# Altium PCB avcilar.PcbDoc
Units mm, origin at the board's own origin, x right, y up, seen from the top; angles counter-clockwise.
Board outline 60 x 75 mm, 2 copper layers (Top Layer, Bottom Layer); 40 components, 25 nets, 122 pads, 23 vias.
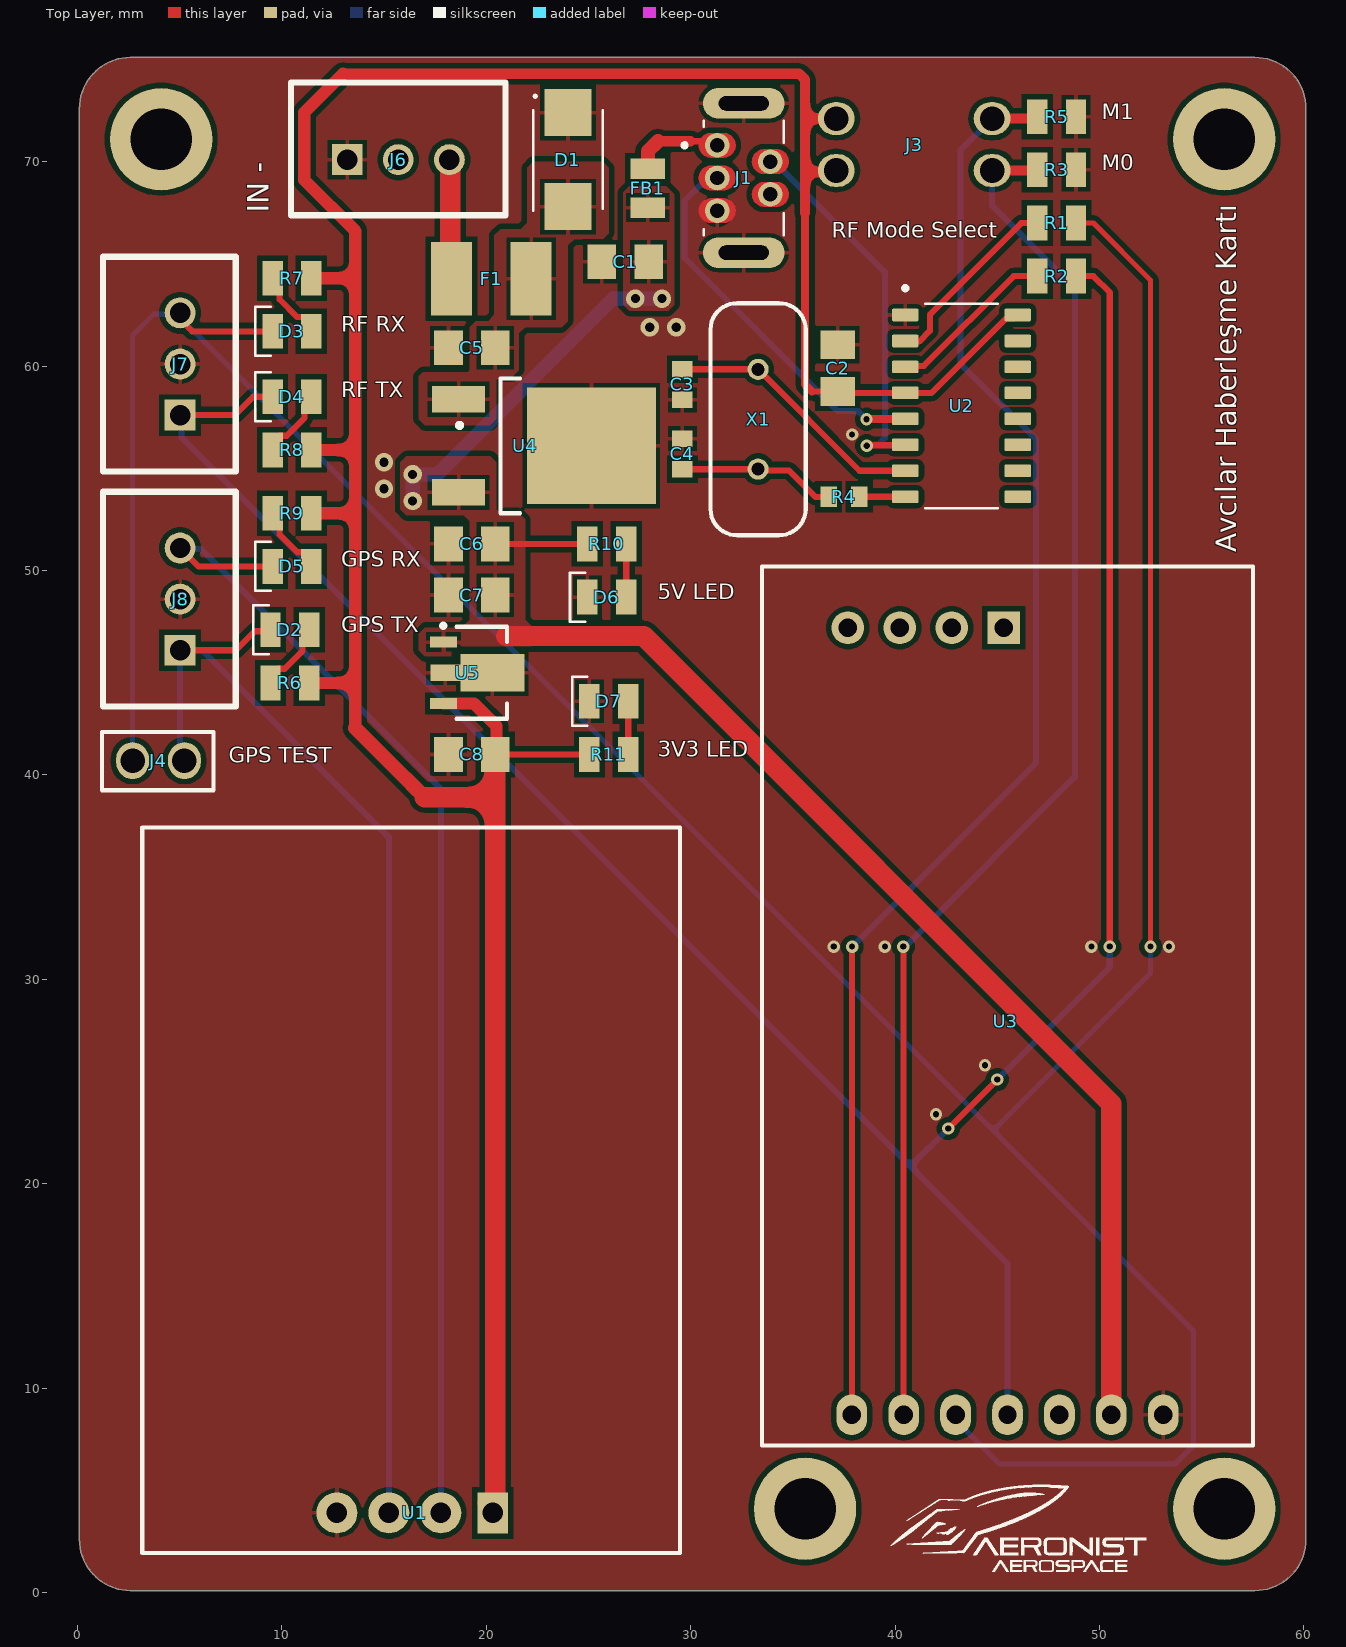
[diagram p0: Top Layer view]
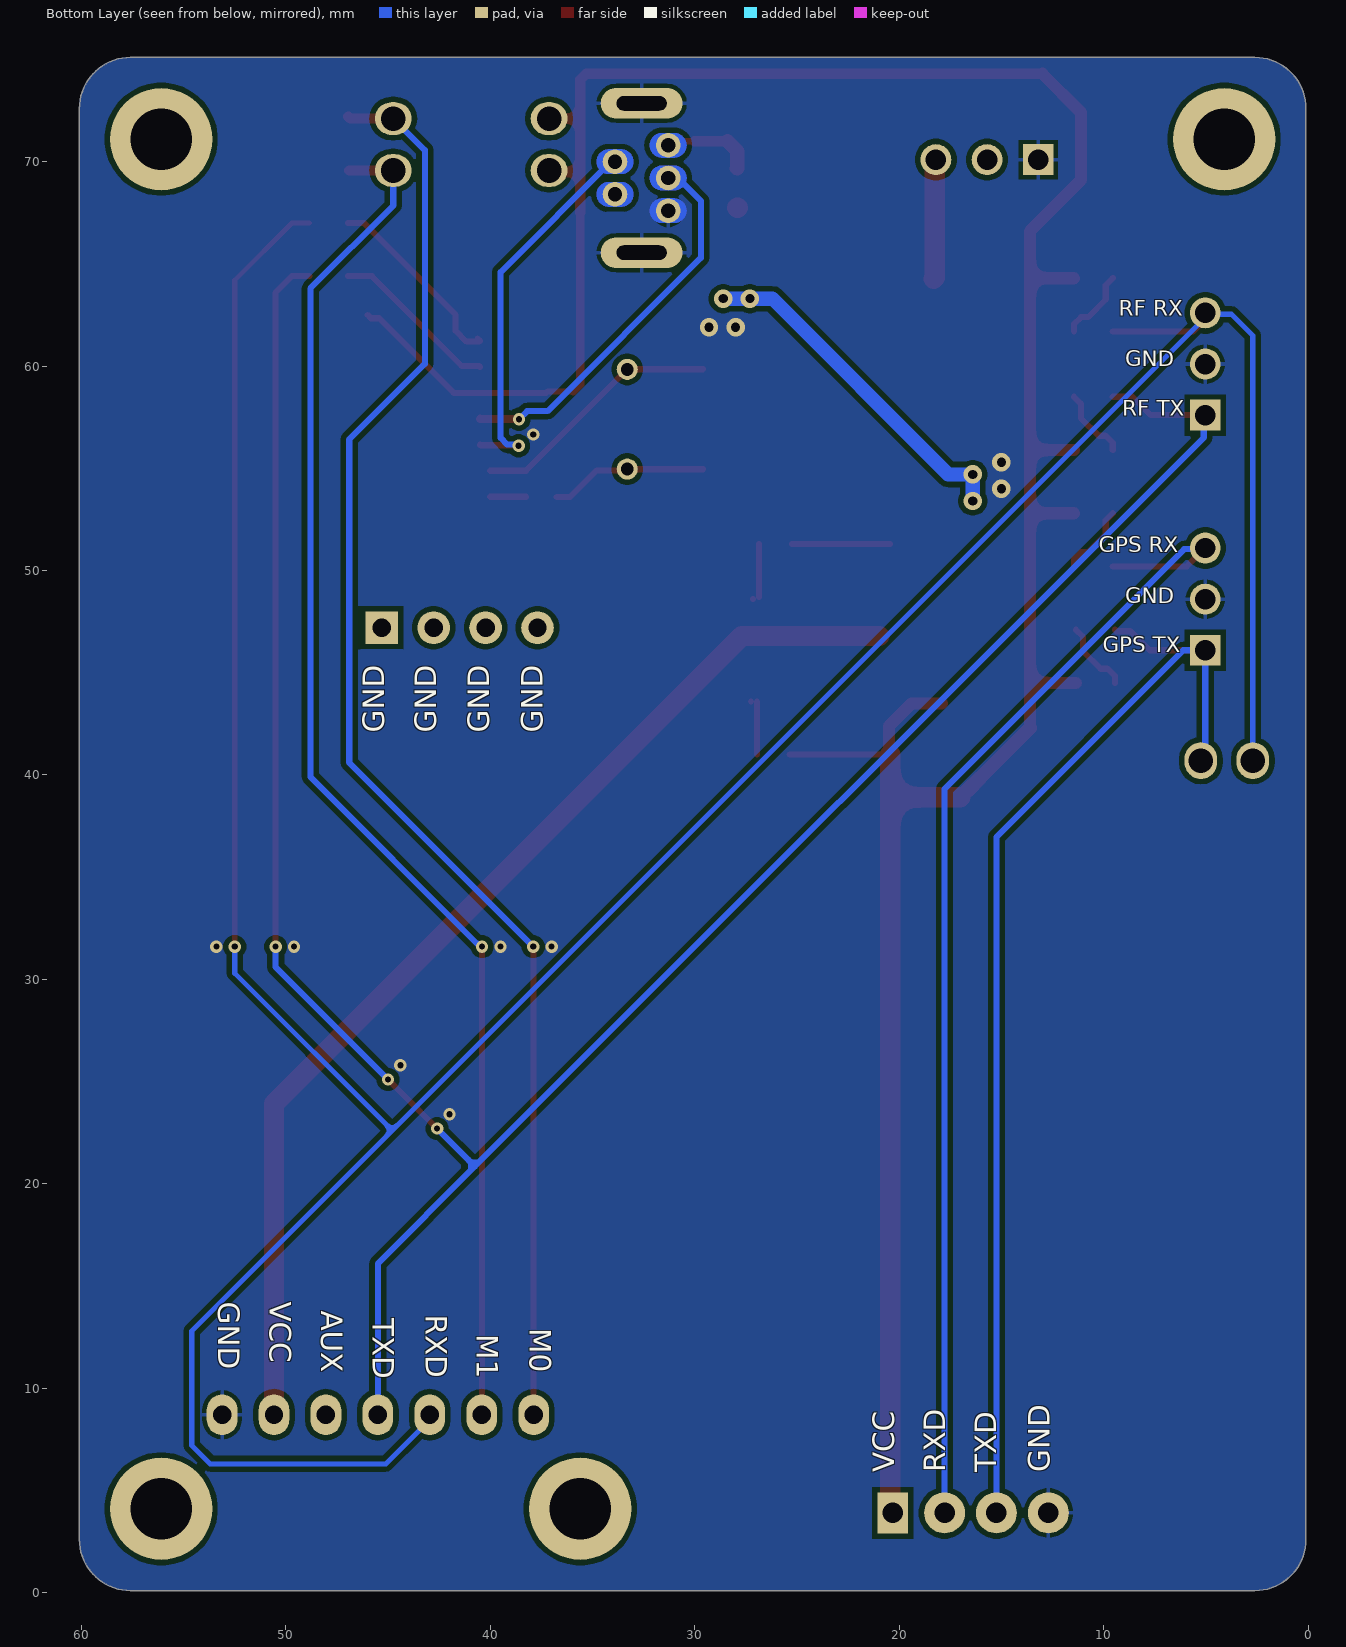
[diagram p1: Bottom Layer view, seen from below]
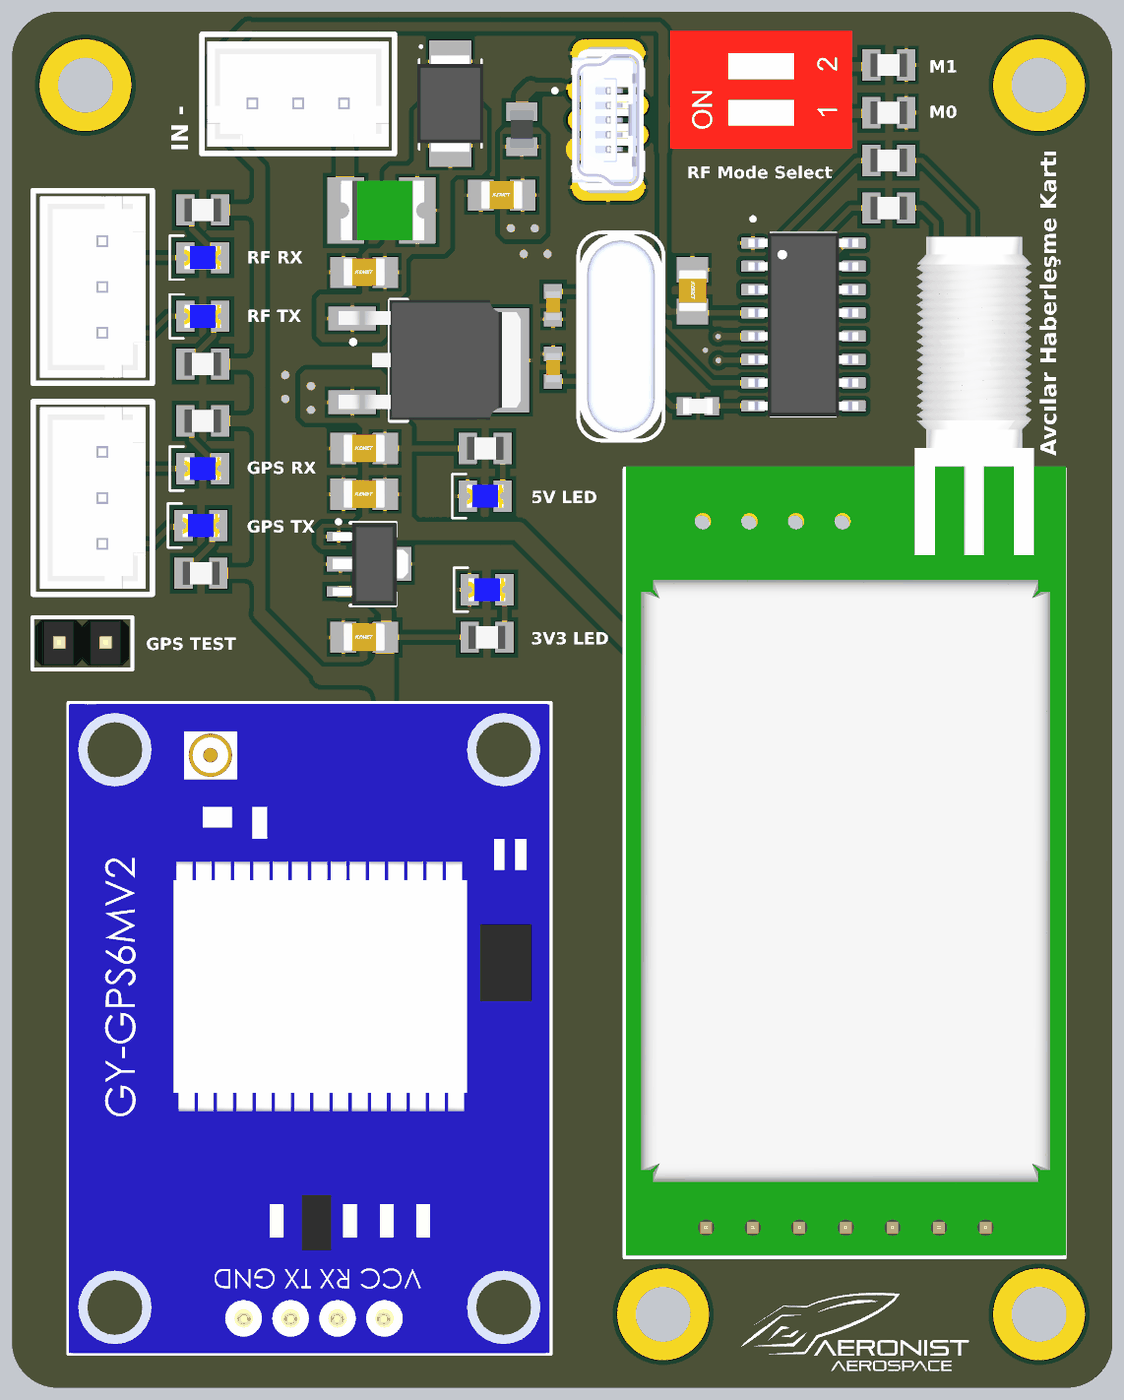
[diagram p2: 3D render of the assembled board from above, using the file's embedded part models]

## Layer stack, top to bottom
Top Solder: solder mask 0.0102, Solder Resist, Dk 3.5
Top Layer: signal copper 0.0356
Dielectric 1: dielectric 0.32, FR-4, Dk 4.8
Bottom Layer: signal copper 0.0356
Bottom Solder: solder mask 0.0102, Solder Resist, Dk 3.5

## Board outline
2.6,0.1 cw(c2.6,2.6) 0.1,2.6 0.1,72.6 cw(c2.6,72.6) 2.6,75.1 57.6,75.1 cw(c57.6,72.6) 60.1,72.6 60.1,2.6 cw(c57.6,2.6) 57.6,0.1

## Design rules (kind name [scope] priority, off if disabled: settings)
Clearance [All] p1: gap=0.254 ignorepadtopadclearanceinfootprint=FALSE except(0.1: SMDPad-SMDPad; 0.2: Arc-Arc Arc-Track Arc-SMDPad Arc-Hole Track-Track Track-SMDPad Track-Hole SMDPad-THPad SMDPad-Hole THPad-Hole Via-Hole Fill-Hole Poly-Hole Region-Hole Text-Hole; 0.3: Arc-Via Track-Via Via-Via; 0.33: Arc-THPad Track-THPad; 0.4: THPad-THPad)
DiffPairsRouting [All] p1: maxlimit=0.203 minlimit=0.203 mostfreqgap=0.203 toplayer_minwidth=0.26 toplayer_maxwidth=0.26 toplayer_prefwidth=0.26 bottomlayer_minwidth=0.26 bottomlayer_maxwidth=0.26 bottomlayer_prefwidth=0.26 maxuncoupledlength=12.7
HoleSize [All] p1: absolutevalues=TRUE maxlimit=6 minlimit=0.3 maxpercent=80.000 minpercent=20.000
HoleToHoleClearance [All] p1: gap=0.5 allowstackedmicrovias=TRUE
MinimumSolderMaskSliver [All] p1: minsoldermaskwidth=0.005
PolygonConnect [All] p1: thpad.connectstyle=Relief thpad.reliefconductorwidth=0.2 thpad.reliefentries=4 thpad.polygonreliefangle="90 Angle" thpad.airgapwidth=0.2 smdpad.connectstyle=Relief smdpad.reliefconductorwidth=0.2 smdpad.reliefentries=4 smdpad.polygonreliefangle="90 Angle" smdpad.airgapwidth=0.2 via.connectstyle=Direct via.reliefconductorwidth=0.2 via.reliefentries=4 via.polygonreliefangle="90 Angle" via.airgapwidth=0.2
RoutingVias [All] p1: holewidth=0.3 width=0.7 viastyle="Through Hole" minholewidth=0.3 minwidth=0.5 maxholewidth=0.7 maxwidth=0.9
SilkToSilkClearance [All] p1: silktosilkclearance=0.2
SolderMaskExpansion [All] p1: expansion=0.05 istentingtop=FALSE
UnRoutedNet [All] p1: checkbadconnections=TRUE
Width [All] p1: maxlimit=1 minlimit=0.2 preferedwidth=0.3 minimp=50.000000 maximp=50.000000 favimp=50.000000
24 further rules are at their usual default settings.

## Components (designator, comment, footprint, x,y, rotation, side; value= is the part's Value field where it differs from the comment)
C1 "100n" "CAP 0805" 26.8,65.1 r0 top
C2 "100 nF" "CAP 0805" 37.2,59.9 r270 top
C3 "27 pF" "CAP 0603" 29.6,59.1 r90 top
C4 "27 pF" "CAP 0603" 29.6,55.7 r270 top
C5 "0u33" "CAP 0805" 19.3,60.9 r0 top
C6 "100n" "CAP 0805" 19.3,51.3 r0 top
C7 "1u" "CAP 0805" 19.3,48.8 r0 top
C8 "2u2" "CAP 0805" 19.3,41 r0 top
D1 "SMBJ8.0CA-13-F" SMBJ12CA-13-F 24,70.1 r90 top
D2 "LED 0805 BLUE" "LED 0805 BLUE" 10.4,47.1 r0 top
D3 "LED 0805 BLUE" "LED 0805 BLUE" 10.5,61.7 r0 top
D4 "LED 0805 BLUE" "LED 0805 BLUE" 10.5,58.5 r0 top
D5 "LED 0805 BLUE" "LED 0805 BLUE" 10.5,50.2 r0 top
D6 "LED 0805 BLUE" "LED 0805 BLUE" 25.9,48.7 r0 top
D7 "LED 0805 BLUE" "LED 0805 BLUE" 26,43.6 r0 top
F1 "0ZCG0075FF2C" 0ZCG0075FF2C 20.3,64.4 r0 top
FB1 "120R" "FB 0805" 27.9,68.7 r270 top
J1 "UE25BE5510H" UE25BE55H 32.6,69.2 r90 top
J3 "2 Pin DIP Switch" "2 PIN DIP SWITCH" 44.747,69.567 r90 top
J4 "1x2 HEADER MALE" "1x2 HEADER MALE" 2.7,40.7 r180 top
J6 "JST B3B-XH-A" JST_B3B-XH-A 15.7,70.625 r0 top
J7 "JST B3B-XH-A" JST_B3B-XH-A 4.5,60.1 r90 top
J8 "JST B3B-XH-A" JST_B3B-XH-A 4.5,48.6 r90 top
R1 "1K" "RES 0805" 47.9,67 r180 top
R2 "1K" "RES 0805" 47.9,64.4 r180 top
R3 "10K" "RES 0805" 47.9,69.6 r180 top
R4 "0R" "RES 0603" 37.5,53.6 r0 top
R5 "10K" "RES 0805" 47.9,72.2 r180 top
R6 "1K" "RES 0805" 10.4,44.5 r180 top
R7 "1K" "RES 0805" 10.5,64.3 r180 top
R8 "1K" "RES 0805" 10.5,55.9 r180 top
R9 "1K" "RES 0805" 10.5,52.8 r180 top
R10 "1K" "RES 0805" 25.9,51.3 r0 top
R11 "1K" "RES 0805" 26,41 r0 top
U1 "GPS GY-NEO6MV2" "GPS GY-NEO6MV2" 3.175,37.433 r270 top
U2 "CH340G" CH340G 43.25,58.055 r0 top
U3 "LORA E32-900T30D" "LORA E32-900T30D" 57.465,7.176 r90 top
U4 "NCV7805BDTRKG" L78M05CDT-TR 22.8,56.1 r0 top
U5 "AP2205-33Y-13" AP2205-33Y-13 19.563,45 r270 top
X1 "ECS-120-S-4X" XTAL_ECS-120-S-4X 33.3,57.4 r270 top

## Footprints (in the part's own frame and the unit in brackets; to place one, negate y for a bottom-side part, rotate by r counter-clockwise, add the part's x,y. Pads: shape width x height; smd on the part's side, far side on the other; paste and mask are expansions set on the pad)
0ZCG0075FF2C [mm] "PTC"
  rect 2x3.6 smd: 1(-2,-0.125) 2(1.9,-0.125)
  body extent -2.26,-1.75 2.29,1.49, height 0.7
"1x2 HEADER MALE" [mm]
  oval 1.6x1.8 hole 1.2: 1(-2.54,0) 2(0,0)
  silkscreen extent -3.97,-1.4 1.5,1.45, body extent -3.76,-1.27 1.32,1.27, height 9.2
"2 PIN DIP SWITCH" [mm]
  oval 1.6x1.8 hole 1.2: 1(0,0) 2(2.54,0) 3(0,7.62) 4(2.54,7.62)
  body extent -1.92,-1.15 4.52,8.75, height 6.7
AP2205-33Y-13 [mm]
  rect 0.55x1.3 smd: 1(-1.5,-1.65) 3(1.5,-1.65)
  rect 1.85x3.125 smd: 2(0,0.737)
  rect 0.8x1.475 smd: 2(0,-1.562)
  silkscreen extent -2.4,-1.76 2.25,1.45, body extent -2.25,-1.97 2.25,2.12, height 1.6
"CAP 0603" [mm]
  rect 0.8x1 smd: 1(-0.75,0) 2(0.75,0)
  body extent -0.8,-0.4 0.8,0.4, height 0.51
"CAP 0805" [mm]
  rect 1.4x1.7 smd: 1(-1.143,0) 2(1.143,0)
  body extent -1.15,-0.76 1.15,0.79, height 1.01
CH340G [mm]
  rrect25% 1.31x0.62 smd: 1(-2.75,4.445) 2(-2.75,3.175) 3(-2.75,1.905) 4(-2.75,0.635) 5(-2.75,-0.635) 6(-2.75,-1.905) 7(-2.75,-3.175) 8(-2.75,-4.445) 9(2.75,-4.445) 10(2.75,-3.175) 11(2.75,-1.905) 12(2.75,-0.635) 13(2.75,0.635) 14(2.75,1.905) 15(2.75,3.175) 16(2.75,4.445)
  silkscreen extent -2.85,-5 1.78,5.85, body extent -3,-5 3,5, height 1.8
"FB 0805" [mm]
  rect 1x1.7 smd: 1(-0.95,0) 2(0.95,0)
  body extent -1,-0.63 1,0.63, height 0.86
"GPS GY-NEO6MV2" [mm]
  rect 2x1.5 hole 1: 1(33.533,17.145)
  round 2 hole 1: 2(33.533,14.605) 3(33.533,12.065) 4(33.533,9.525)
  silkscreen extent 0,0 35.5,26.3, body extent 0.06,0.03 35.46,26.23, height 6.41
JST_B3B-XH-A [mm]
  rect 1.508x1.508 / inner round 1.508 / far side rect 1.508x1.508 hole 1: 1(-2.5,-0.525)
  round 1.508 hole 1: 2(0,-0.525) 3(2.5,-0.525)
  silkscreen extent -5.25,-3.25 5.25,3.25, body extent -4.95,-2.88 4.95,2.88, height 7
L78M05CDT-TR [mm]
  rect 2.6x1.3 smd: 1(-4.15,2.28) 3(-4.15,-2.28)
  rect 6.3x5.7 smd: 2(2.35,0)
  silkscreen extent -4.2,-3.3 -1.15,3.3, body extent -4.89,-3.25 5.04,3.29, height 2.34
"LED 0805 BLUE" [mm]
  rect 1x1.7 smd: A(0.95,0) K(-0.95,0)
  silkscreen extent -1.8,-1.2 -1.05,1.2, body extent -1,-0.63 1,0.63, height 1.12
"LORA E32-900T30D" [mm]
  rect 1.6x1.6 hole 0.9: 0(40.024,12.155)
  round 1.6 hole 0.9: 0(40.024,14.695) 0(40.024,17.235) 0(40.024,19.775)
  oval 2x1.5 hole 0.9: 1(1.524,19.585) 2(1.524,17.045) 3(1.524,14.505) 4(1.524,11.965) 5(1.524,9.425) 6(1.524,6.885) 7(1.524,4.345)
  silkscreen extent 0.02,-0.03 43.02,23.97, body extent 0.15,-0.1 55.65,23.9, height 7.8
"RES 0603" [mm]
  rect 0.8x1 smd: 1(-0.75,0) 2(0.75,0)
  body extent -0.8,-0.43 0.8,0.43, height 0.52
"RES 0805" [mm]
  rect 1x1.7 smd: 1(-0.95,0) 2(0.95,0)
  body extent -1,-0.63 1,0.63, height 0.47
SMBJ12CA-13-F [mm]
  rect 2.3x2.3 smd: 1(2.3,0) 2(-2.3,0)
  silkscreen extent -2.5,-1.7 3.15,1.7, body extent -2.65,-1.81 2.65,1.81, height 2.5
UE25BE55H [mm]
  round 1.2 hole 0.7 mask+0: 1(1.6,1.3) 2(0.8,-1.3) 3(0,1.3) 4(-0.8,-1.3) 5(-1.6,1.3)
  oval 1.5x4 hole 0.7 slot 2.45 at 90 deg: SH1(-3.65,0) SH2(3.65,0)
  Top Layer region: 0.831,-0.401 0.863,-0.403 0.894,-0.407 0.925,-0.413 0.955,-0.42 0.985,-0.429 1.015,-0.44 1.044,-0.452 1.072,-0.465 1.1,-0.48 1.127,-0.497 1.153,-0.515 1.178,-0.534 1.201,-0.554 1.224,-0.576 1.246,-0.599 1.266,-0.622 1.285,-0.647 1.303,-0.673 1.32,-0.7 1.335,-0.728 1.348,-0.756 1.36,-0.785 1.371,-0.815 1.38,-0.845 1.387,-0.875 1.393,-0.906 1.397,-0.937 1.399,-0.969 1.4,-1 1.4,-1.6 1.399,-1.631 1.397,-1.663 1.393,-1.694 1.387,-1.725 1.38,-1.755 1.371,-1.785 1.36,-1.815 1.348,-1.844 1.335,-1.872 1.32,-1.9 1.303,-1.927 1.285,-1.953 1.266,-1.978 1.246,-2.001 1.224,-2.024 1.201,-2.046 1.178,-2.066 1.153,-2.085 1.127,-2.103 1.1,-2.12 1.072,-2.135 1.044,-2.148 1.015,-2.16 0.985,-2.171 0.955,-2.18 0.925,-2.187 0.894,-2.193 0.863,-2.197 0.831,-2.199 0.8,-2.2 0.769,-2.199 0.737,-2.197 0.706,-2.193 0.675,-2.187 0.645,-2.18 0.615,-2.171 0.585,-2.16 0.556,-2.148 0.528,-2.135 0.5,-2.12 0.473,-2.103 0.447,-2.085 0.422,-2.066 0.399,-2.046 0.376,-2.024 0.354,-2.001 0.334,-1.978 0.315,-1.953 0.297,-1.927 0.28,-1.9 0.265,-1.872 0.252,-1.844 0.24,-1.815 0.229,-1.785 0.22,-1.755 0.213,-1.725 0.207,-1.694 0.203,-1.663 0.201,-1.631 0.2,-1.6 0.2,-1 0.201,-0.969 0.203,-0.937 0.207,-0.906 0.213,-0.875 0.22,-0.845 0.229,-0.815 0.24,-0.785 0.252,-0.756 0.265,-0.728 0.28,-0.7 0.297,-0.673 0.315,-0.647 0.334,-0.622 0.354,-0.599 0.376,-0.576 0.399,-0.554 0.422,-0.534 0.447,-0.515 0.473,-0.497 0.5,-0.48 0.528,-0.465 0.556,-0.452 0.585,-0.44 0.615,-0.429 0.645,-0.42 0.675,-0.413 0.706,-0.407 0.737,-0.403 0.769,-0.401 0.8,-0.4
  Top Layer region: -0.769,-0.401 -0.737,-0.403 -0.706,-0.407 -0.675,-0.413 -0.645,-0.42 -0.615,-0.429 -0.585,-0.44 -0.556,-0.452 -0.528,-0.465 -0.5,-0.48 -0.473,-0.497 -0.447,-0.515 -0.422,-0.534 -0.399,-0.554 -0.376,-0.576 -0.354,-0.599 -0.334,-0.622 -0.315,-0.647 -0.297,-0.673 -0.28,-0.7 -0.265,-0.728 -0.252,-0.756 -0.24,-0.785 -0.229,-0.815 -0.22,-0.845 -0.213,-0.875 -0.207,-0.906 -0.203,-0.937 -0.201,-0.969 -0.2,-1 -0.2,-1.6 -0.201,-1.631 -0.203,-1.663 -0.207,-1.694 -0.213,-1.725 -0.22,-1.755 -0.229,-1.785 -0.24,-1.815 -0.252,-1.844 -0.265,-1.872 -0.28,-1.9 -0.297,-1.927 -0.315,-1.953 -0.334,-1.978 -0.354,-2.001 -0.376,-2.024 -0.399,-2.046 -0.422,-2.066 -0.447,-2.085 -0.473,-2.103 -0.5,-2.12 -0.528,-2.135 -0.556,-2.148 -0.585,-2.16 -0.615,-2.171 -0.645,-2.18 -0.675,-2.187 -0.706,-2.193 -0.737,-2.197 -0.769,-2.199 -0.8,-2.2 -0.831,-2.199 -0.863,-2.197 -0.894,-2.193 -0.925,-2.187 -0.955,-2.18 -0.985,-2.171 -1.015,-2.16 -1.044,-2.148 -1.072,-2.135 -1.1,-2.12 -1.127,-2.103 -1.153,-2.085 -1.178,-2.066 -1.201,-2.046 -1.224,-2.024 -1.246,-2.001 -1.266,-1.978 -1.285,-1.953 -1.303,-1.927 -1.32,-1.9 -1.335,-1.872 -1.348,-1.844 -1.36,-1.815 -1.371,-1.785 -1.38,-1.755 -1.387,-1.725 -1.393,-1.694 -1.397,-1.663 -1.399,-1.631 -1.4,-1.6 -1.4,-1 -1.399,-0.969 -1.397,-0.937 -1.393,-0.906 -1.387,-0.875 -1.38,-0.845 -1.371,-0.815 -1.36,-0.785 -1.348,-0.756 -1.335,-0.728 -1.32,-0.7 -1.303,-0.673 -1.285,-0.647 -1.266,-0.622 -1.246,-0.599 -1.224,-0.576 -1.201,-0.554 -1.178,-0.534 -1.153,-0.515 -1.127,-0.497 -1.1,-0.48 -1.072,-0.465 -1.044,-0.452 -1.015,-0.44 -0.985,-0.429 -0.955,-0.42 -0.925,-0.413 -0.894,-0.407 -0.863,-0.403 -0.831,-0.401 -0.8,-0.4
  Top Layer region: 1.631,2.199 1.663,2.197 1.694,2.193 1.725,2.187 1.755,2.18 1.785,2.171 1.815,2.16 1.844,2.148 1.872,2.135 1.9,2.12 1.927,2.103 1.953,2.085 1.978,2.066 2.001,2.046 2.024,2.024 2.046,2.001 2.066,1.978 2.085,1.953 2.103,1.927 2.12,1.9 2.135,1.872 2.148,1.844 2.16,1.815 2.171,1.785 2.18,1.755 2.187,1.725 2.193,1.694 2.197,1.663 2.199,1.631 2.2,1.6 2.2,1 2.199,0.969 2.197,0.937 2.193,0.906 2.187,0.875 2.18,0.845 2.171,0.815 2.16,0.785 2.148,0.756 2.135,0.728 2.12,0.7 2.103,0.673 2.085,0.647 2.066,0.622 2.046,0.599 2.024,0.576 2.001,0.554 1.978,0.534 1.953,0.515 1.927,0.497 1.9,0.48 1.872,0.465 1.844,0.452 1.815,0.44 1.785,0.429 1.755,0.42 1.725,0.413 1.694,0.407 1.663,0.403 1.631,0.401 1.6,0.4 1.569,0.401 1.537,0.403 1.506,0.407 1.475,0.413 1.445,0.42 1.415,0.429 1.385,0.44 1.356,0.452 1.328,0.465 1.3,0.48 1.273,0.497 1.247,0.515 1.222,0.534 1.199,0.554 1.176,0.576 1.154,0.599 1.134,0.622 1.115,0.647 1.097,0.673 1.08,0.7 1.065,0.728 1.052,0.756 1.04,0.785 1.029,0.815 1.02,0.845 1.013,0.875 1.007,0.906 1.003,0.937 1.001,0.969 1,1 1,1.6 1.001,1.631 1.003,1.663 1.007,1.694 1.013,1.725 1.02,1.755 1.029,1.785 1.04,1.815 1.052,1.844 1.065,1.872 1.08,1.9 1.097,1.927 1.115,1.953 1.134,1.978 1.154,2.001 1.176,2.024 1.199,2.046 1.222,2.066 1.247,2.085 1.273,2.103 1.3,2.12 1.328,2.135 1.356,2.148 1.385,2.16 1.415,2.171 1.445,2.18 1.475,2.187 1.506,2.193 1.537,2.197 1.569,2.199 1.6,2.2
  Top Layer region: -1.569,2.199 -1.537,2.197 -1.506,2.193 -1.475,2.187 -1.445,2.18 -1.415,2.171 -1.385,2.16 -1.356,2.148 -1.328,2.135 -1.3,2.12 -1.273,2.103 -1.247,2.085 -1.222,2.066 -1.199,2.046 -1.176,2.024 -1.154,2.001 -1.134,1.978 -1.115,1.953 -1.097,1.927 -1.08,1.9 -1.065,1.872 -1.052,1.844 -1.04,1.815 -1.029,1.785 -1.02,1.755 -1.013,1.725 -1.007,1.694 -1.003,1.663 -1.001,1.631 -1,1.6 -1,1 -1.001,0.969 -1.003,0.937 -1.007,0.906 -1.013,0.875 -1.02,0.845 -1.029,0.815 -1.04,0.785 -1.052,0.756 -1.065,0.728 -1.08,0.7 -1.097,0.673 -1.115,0.647 -1.134,0.622 -1.154,0.599 -1.176,0.576 -1.199,0.554 -1.222,0.534 -1.247,0.515 -1.273,0.497 -1.3,0.48 -1.328,0.465 -1.356,0.452 -1.385,0.44 -1.415,0.429 -1.445,0.42 -1.475,0.413 -1.506,0.407 -1.537,0.403 -1.569,0.401 -1.6,0.4 -1.631,0.401 -1.663,0.403 -1.694,0.407 -1.725,0.413 -1.755,0.42 -1.785,0.429 -1.815,0.44 -1.844,0.452 -1.872,0.465 -1.9,0.48 -1.927,0.497 -1.953,0.515 -1.978,0.534 -2.001,0.554 -2.024,0.576 -2.046,0.599 -2.066,0.622 -2.085,0.647 -2.103,0.673 -2.12,0.7 -2.135,0.728 -2.148,0.756 -2.16,0.785 -2.171,0.815 -2.18,0.845 -2.187,0.875 -2.193,0.906 -2.197,0.937 -2.199,0.969 -2.2,1 -2.2,1.6 -2.199,1.631 -2.197,1.663 -2.193,1.694 -2.187,1.725 -2.18,1.755 -2.171,1.785 -2.16,1.815 -2.148,1.844 -2.135,1.872 -2.12,1.9 -2.103,1.927 -2.085,1.953 -2.066,1.978 -2.046,2.001 -2.024,2.024 -2.001,2.046 -1.978,2.066 -1.953,2.085 -1.927,2.103 -1.9,2.12 -1.872,2.135 -1.844,2.148 -1.815,2.16 -1.785,2.171 -1.755,2.18 -1.725,2.187 -1.694,2.193 -1.663,2.197 -1.631,2.199 -1.6,2.2
  Top Layer region: 0.031,2.199 0.063,2.197 0.094,2.193 0.125,2.187 0.155,2.18 0.185,2.171 0.215,2.16 0.244,2.148 0.272,2.135 0.3,2.12 0.327,2.103 0.353,2.085 0.378,2.066 0.401,2.046 0.424,2.024 0.446,2.001 0.466,1.978 0.485,1.953 0.503,1.927 0.52,1.9 0.535,1.872 0.548,1.844 0.56,1.815 0.571,1.785 0.58,1.755 0.587,1.725 0.593,1.694 0.597,1.663 0.599,1.631 0.6,1.6 0.6,1 0.599,0.969 0.597,0.937 0.593,0.906 0.587,0.875 0.58,0.845 0.571,0.815 0.56,0.785 0.548,0.756 0.535,0.728 0.52,0.7 0.503,0.673 0.485,0.647 0.466,0.622 0.446,0.599 0.424,0.576 0.401,0.554 0.378,0.534 0.353,0.515 0.327,0.497 0.3,0.48 0.272,0.465 0.244,0.452 0.215,0.44 0.185,0.429 0.155,0.42 0.125,0.413 0.094,0.407 0.063,0.403 0.031,0.401 0,0.4 -0.031,0.401 -0.063,0.403 -0.094,0.407 -0.125,0.413 -0.155,0.42 -0.185,0.429 -0.215,0.44 -0.244,0.452 -0.272,0.465 -0.3,0.48 -0.327,0.497 -0.353,0.515 -0.378,0.534 -0.401,0.554 -0.424,0.576 -0.446,0.599 -0.466,0.622 -0.485,0.647 -0.503,0.673 -0.52,0.7 -0.535,0.728 -0.548,0.756 -0.56,0.785 -0.571,0.815 -0.58,0.845 -0.587,0.875 -0.593,0.906 -0.597,0.937 -0.599,0.969 -0.6,1 -0.6,1.6 -0.599,1.631 -0.597,1.663 -0.593,1.694 -0.587,1.725 -0.58,1.755 -0.571,1.785 -0.56,1.815 -0.548,1.844 -0.535,1.872 -0.52,1.9 -0.503,1.927 -0.485,1.953 -0.466,1.978 -0.446,2.001 -0.424,2.024 -0.401,2.046 -0.378,2.066 -0.353,2.085 -0.327,2.103 -0.3,2.12 -0.272,2.135 -0.244,2.148 -0.215,2.16 -0.185,2.171 -0.155,2.18 -0.125,2.187 -0.094,2.193 -0.063,2.197 -0.031,2.199 0,2.2
  Bottom Layer region: 0.831,-0.401 0.863,-0.403 0.894,-0.407 0.925,-0.413 0.955,-0.42 0.985,-0.429 1.015,-0.44 1.044,-0.452 1.072,-0.465 1.1,-0.48 1.127,-0.497 1.153,-0.515 1.178,-0.534 1.201,-0.554 1.224,-0.576 1.246,-0.599 1.266,-0.622 1.285,-0.647 1.303,-0.673 1.32,-0.7 1.335,-0.728 1.348,-0.756 1.36,-0.785 1.371,-0.815 1.38,-0.845 1.387,-0.875 1.393,-0.906 1.397,-0.937 1.399,-0.969 1.4,-1 1.4,-1.6 1.399,-1.631 1.397,-1.663 1.393,-1.694 1.387,-1.725 1.38,-1.755 1.371,-1.785 1.36,-1.815 1.348,-1.844 1.335,-1.872 1.32,-1.9 1.303,-1.927 1.285,-1.953 1.266,-1.978 1.246,-2.001 1.224,-2.024 1.201,-2.046 1.178,-2.066 1.153,-2.085 1.127,-2.103 1.1,-2.12 1.072,-2.135 1.044,-2.148 1.015,-2.16 0.985,-2.171 0.955,-2.18 0.925,-2.187 0.894,-2.193 0.863,-2.197 0.831,-2.199 0.8,-2.2 0.769,-2.199 0.737,-2.197 0.706,-2.193 0.675,-2.187 0.645,-2.18 0.615,-2.171 0.585,-2.16 0.556,-2.148 0.528,-2.135 0.5,-2.12 0.473,-2.103 0.447,-2.085 0.422,-2.066 0.399,-2.046 0.376,-2.024 0.354,-2.001 0.334,-1.978 0.315,-1.953 0.297,-1.927 0.28,-1.9 0.265,-1.872 0.252,-1.844 0.24,-1.815 0.229,-1.785 0.22,-1.755 0.213,-1.725 0.207,-1.694 0.203,-1.663 0.201,-1.631 0.2,-1.6 0.2,-1 0.201,-0.969 0.203,-0.937 0.207,-0.906 0.213,-0.875 0.22,-0.845 0.229,-0.815 0.24,-0.785 0.252,-0.756 0.265,-0.728 0.28,-0.7 0.297,-0.673 0.315,-0.647 0.334,-0.622 0.354,-0.599 0.376,-0.576 0.399,-0.554 0.422,-0.534 0.447,-0.515 0.473,-0.497 0.5,-0.48 0.528,-0.465 0.556,-0.452 0.585,-0.44 0.615,-0.429 0.645,-0.42 0.675,-0.413 0.706,-0.407 0.737,-0.403 0.769,-0.401 0.8,-0.4
  Bottom Layer region: -0.769,-0.401 -0.737,-0.403 -0.706,-0.407 -0.675,-0.413 -0.645,-0.42 -0.615,-0.429 -0.585,-0.44 -0.556,-0.452 -0.528,-0.465 -0.5,-0.48 -0.473,-0.497 -0.447,-0.515 -0.422,-0.534 -0.399,-0.554 -0.376,-0.576 -0.354,-0.599 -0.334,-0.622 -0.315,-0.647 -0.297,-0.673 -0.28,-0.7 -0.265,-0.728 -0.252,-0.756 -0.24,-0.785 -0.229,-0.815 -0.22,-0.845 -0.213,-0.875 -0.207,-0.906 -0.203,-0.937 -0.201,-0.969 -0.2,-1 -0.2,-1.6 -0.201,-1.631 -0.203,-1.663 -0.207,-1.694 -0.213,-1.725 -0.22,-1.755 -0.229,-1.785 -0.24,-1.815 -0.252,-1.844 -0.265,-1.872 -0.28,-1.9 -0.297,-1.927 -0.315,-1.953 -0.334,-1.978 -0.354,-2.001 -0.376,-2.024 -0.399,-2.046 -0.422,-2.066 -0.447,-2.085 -0.473,-2.103 -0.5,-2.12 -0.528,-2.135 -0.556,-2.148 -0.585,-2.16 -0.615,-2.171 -0.645,-2.18 -0.675,-2.187 -0.706,-2.193 -0.737,-2.197 -0.769,-2.199 -0.8,-2.2 -0.831,-2.199 -0.863,-2.197 -0.894,-2.193 -0.925,-2.187 -0.955,-2.18 -0.985,-2.171 -1.015,-2.16 -1.044,-2.148 -1.072,-2.135 -1.1,-2.12 -1.127,-2.103 -1.153,-2.085 -1.178,-2.066 -1.201,-2.046 -1.224,-2.024 -1.246,-2.001 -1.266,-1.978 -1.285,-1.953 -1.303,-1.927 -1.32,-1.9 -1.335,-1.872 -1.348,-1.844 -1.36,-1.815 -1.371,-1.785 -1.38,-1.755 -1.387,-1.725 -1.393,-1.694 -1.397,-1.663 -1.399,-1.631 -1.4,-1.6 -1.4,-1 -1.399,-0.969 -1.397,-0.937 -1.393,-0.906 -1.387,-0.875 -1.38,-0.845 -1.371,-0.815 -1.36,-0.785 -1.348,-0.756 -1.335,-0.728 -1.32,-0.7 -1.303,-0.673 -1.285,-0.647 -1.266,-0.622 -1.246,-0.599 -1.224,-0.576 -1.201,-0.554 -1.178,-0.534 -1.153,-0.515 -1.127,-0.497 -1.1,-0.48 -1.072,-0.465 -1.044,-0.452 -1.015,-0.44 -0.985,-0.429 -0.955,-0.42 -0.925,-0.413 -0.894,-0.407 -0.863,-0.403 -0.831,-0.401 -0.8,-0.4
  Bottom Layer region: 1.631,2.199 1.663,2.197 1.694,2.193 1.725,2.187 1.755,2.18 1.785,2.171 1.815,2.16 1.844,2.148 1.872,2.135 1.9,2.12 1.927,2.103 1.953,2.085 1.978,2.066 2.001,2.046 2.024,2.024 2.046,2.001 2.066,1.978 2.085,1.953 2.103,1.927 2.12,1.9 2.135,1.872 2.148,1.844 2.16,1.815 2.171,1.785 2.18,1.755 2.187,1.725 2.193,1.694 2.197,1.663 2.199,1.631 2.2,1.6 2.2,1 2.199,0.969 2.197,0.937 2.193,0.906 2.187,0.875 2.18,0.845 2.171,0.815 2.16,0.785 2.148,0.756 2.135,0.728 2.12,0.7 2.103,0.673 2.085,0.647 2.066,0.622 2.046,0.599 2.024,0.576 2.001,0.554 1.978,0.534 1.953,0.515 1.927,0.497 1.9,0.48 1.872,0.465 1.844,0.452 1.815,0.44 1.785,0.429 1.755,0.42 1.725,0.413 1.694,0.407 1.663,0.403 1.631,0.401 1.6,0.4 1.569,0.401 1.537,0.403 1.506,0.407 1.475,0.413 1.445,0.42 1.415,0.429 1.385,0.44 1.356,0.452 1.328,0.465 1.3,0.48 1.273,0.497 1.247,0.515 1.222,0.534 1.199,0.554 1.176,0.576 1.154,0.599 1.134,0.622 1.115,0.647 1.097,0.673 1.08,0.7 1.065,0.728 1.052,0.756 1.04,0.785 1.029,0.815 1.02,0.845 1.013,0.875 1.007,0.906 1.003,0.937 1.001,0.969 1,1 1,1.6 1.001,1.631 1.003,1.663 1.007,1.694 1.013,1.725 1.02,1.755 1.029,1.785 1.04,1.815 1.052,1.844 1.065,1.872 1.08,1.9 1.097,1.927 1.115,1.953 1.134,1.978 1.154,2.001 1.176,2.024 1.199,2.046 1.222,2.066 1.247,2.085 1.273,2.103 1.3,2.12 1.328,2.135 1.356,2.148 1.385,2.16 1.415,2.171 1.445,2.18 1.475,2.187 1.506,2.193 1.537,2.197 1.569,2.199 1.6,2.2
  Bottom Layer region: -1.569,2.199 -1.537,2.197 -1.506,2.193 -1.475,2.187 -1.445,2.18 -1.415,2.171 -1.385,2.16 -1.356,2.148 -1.328,2.135 -1.3,2.12 -1.273,2.103 -1.247,2.085 -1.222,2.066 -1.199,2.046 -1.176,2.024 -1.154,2.001 -1.134,1.978 -1.115,1.953 -1.097,1.927 -1.08,1.9 -1.065,1.872 -1.052,1.844 -1.04,1.815 -1.029,1.785 -1.02,1.755 -1.013,1.725 -1.007,1.694 -1.003,1.663 -1.001,1.631 -1,1.6 -1,1 -1.001,0.969 -1.003,0.937 -1.007,0.906 -1.013,0.875 -1.02,0.845 -1.029,0.815 -1.04,0.785 -1.052,0.756 -1.065,0.728 -1.08,0.7 -1.097,0.673 -1.115,0.647 -1.134,0.622 -1.154,0.599 -1.176,0.576 -1.199,0.554 -1.222,0.534 -1.247,0.515 -1.273,0.497 -1.3,0.48 -1.328,0.465 -1.356,0.452 -1.385,0.44 -1.415,0.429 -1.445,0.42 -1.475,0.413 -1.506,0.407 -1.537,0.403 -1.569,0.401 -1.6,0.4 -1.631,0.401 -1.663,0.403 -1.694,0.407 -1.725,0.413 -1.755,0.42 -1.785,0.429 -1.815,0.44 -1.844,0.452 -1.872,0.465 -1.9,0.48 -1.927,0.497 -1.953,0.515 -1.978,0.534 -2.001,0.554 -2.024,0.576 -2.046,0.599 -2.066,0.622 -2.085,0.647 -2.103,0.673 -2.12,0.7 -2.135,0.728 -2.148,0.756 -2.16,0.785 -2.171,0.815 -2.18,0.845 -2.187,0.875 -2.193,0.906 -2.197,0.937 -2.199,0.969 -2.2,1 -2.2,1.6 -2.199,1.631 -2.197,1.663 -2.193,1.694 -2.187,1.725 -2.18,1.755 -2.171,1.785 -2.16,1.815 -2.148,1.844 -2.135,1.872 -2.12,1.9 -2.103,1.927 -2.085,1.953 -2.066,1.978 -2.046,2.001 -2.024,2.024 -2.001,2.046 -1.978,2.066 -1.953,2.085 -1.927,2.103 -1.9,2.12 -1.872,2.135 -1.844,2.148 -1.815,2.16 -1.785,2.171 -1.755,2.18 -1.725,2.187 -1.694,2.193 -1.663,2.197 -1.631,2.199 -1.6,2.2
  Bottom Layer region: 0.031,2.199 0.063,2.197 0.094,2.193 0.125,2.187 0.155,2.18 0.185,2.171 0.215,2.16 0.244,2.148 0.272,2.135 0.3,2.12 0.327,2.103 0.353,2.085 0.378,2.066 0.401,2.046 0.424,2.024 0.446,2.001 0.466,1.978 0.485,1.953 0.503,1.927 0.52,1.9 0.535,1.872 0.548,1.844 0.56,1.815 0.571,1.785 0.58,1.755 0.587,1.725 0.593,1.694 0.597,1.663 0.599,1.631 0.6,1.6 0.6,1 0.599,0.969 0.597,0.937 0.593,0.906 0.587,0.875 0.58,0.845 0.571,0.815 0.56,0.785 0.548,0.756 0.535,0.728 0.52,0.7 0.503,0.673 0.485,0.647 0.466,0.622 0.446,0.599 0.424,0.576 0.401,0.554 0.378,0.534 0.353,0.515 0.327,0.497 0.3,0.48 0.272,0.465 0.244,0.452 0.215,0.44 0.185,0.429 0.155,0.42 0.125,0.413 0.094,0.407 0.063,0.403 0.031,0.401 0,0.4 -0.031,0.401 -0.063,0.403 -0.094,0.407 -0.125,0.413 -0.155,0.42 -0.185,0.429 -0.215,0.44 -0.244,0.452 -0.272,0.465 -0.3,0.48 -0.327,0.497 -0.353,0.515 -0.378,0.534 -0.401,0.554 -0.424,0.576 -0.446,0.599 -0.466,0.622 -0.485,0.647 -0.503,0.673 -0.52,0.7 -0.535,0.728 -0.548,0.756 -0.56,0.785 -0.571,0.815 -0.58,0.845 -0.587,0.875 -0.593,0.906 -0.597,0.937 -0.599,0.969 -0.6,1 -0.6,1.6 -0.599,1.631 -0.597,1.663 -0.593,1.694 -0.587,1.725 -0.58,1.755 -0.571,1.785 -0.56,1.815 -0.548,1.844 -0.535,1.872 -0.52,1.9 -0.503,1.927 -0.485,1.953 -0.466,1.978 -0.446,2.001 -0.424,2.024 -0.401,2.046 -0.378,2.066 -0.353,2.085 -0.327,2.103 -0.3,2.12 -0.272,2.135 -0.244,2.148 -0.215,2.16 -0.185,2.171 -0.155,2.18 -0.125,2.187 -0.094,2.193 -0.063,2.197 -0.031,2.199 0,2.2
  silkscreen extent -2.8,-1.95 2.8,3, body extent -3.85,-1.95 3.85,1.95, height 7.7
XTAL_ECS-120-S-4X [mm]
  round 1.03 hole 0.63: 1(-2.44,0) 2(2.44,0)
  silkscreen extent -5.68,-2.33 5.68,2.33, body extent -5.68,-2.32 5.68,2.32, height 3.5

## Part data
C1 C2 C5 C6 C7 C8: library part "CAP 0805 50V", "Capacitor SMD 0805 50V"
C3 C4: library part "CAP 0603 50V", "Capacitor SMD 0603 50V"
D1: "SMBJ Series 8 V 600 W SMT Bi-Directional Transient Voltage Suppressor - SMB", Manufacturer="Diodes Zetex", Supplier Part Number 1=9153168, Category="TVS Diodes", ComponentLink1Description=https://datasheet.ciiva.com/16393/ds19002-16393013.pdf?src-supplier=Future+Electronics, ComponentLink1URL=https://datasheet.ciiva.com/16393/ds19002-16393013.pdf?src-supplier=Future+Electronics, Manufacturer Part Number=SMBJ8.0CA-13-F, Pricing 1="3000=0,107, 9000=0,103, 12000=0,102, 30000=0,0982, 45000=0,095 (USD)", RoHS=Yes, Stock 1=6000, Supplier 1="Future Electronics"
D2 D3 D4 D5 D6 D7: "LED 0805 GREEN SMD"
F1: "PTC Resettable Fuse 0.75A(hold) 1.5A(trip) 16VDC 100A 0.8W 0.2s 0.11Ohm SMD Solder Pad 1812 4.73 X 3.41 X 0.65mm T/R...", Case Code (Metric)=4532, Case Code (Imperial)=1812, Hold Current=750mA, Manufacturer=Bel, Max Current Rating=100A, Max Operating Temperature=85°C, Min Operating Temperature=-40°C, Trip Current=1.5A, Case/Package=1812, Category="PTC Resettable Fuses", ComponentLink1Description=https://datasheet.ciiva.com/18550/0zcg-18550523.pdf?src-supplier=Digi-Key, ComponentLink1URL=https://datasheet.ciiva.com/18550/0zcg-18550523.pdf?src-supplier=Digi-Key, ComponentLink2Description=https://datasheet.ciiva.com/18550/0zcg-18550524.pdf?src-supplier=Digi-Key, ComponentLink2URL=https://datasheet.ciiva.com/18550/0zcg-18550524.pdf?src-supplier=Digi-Key, ComponentLink3Description=https://datasheet.ciiva.com/18550/0zcg-18550767.pdf?src-supplier=Digi-Key, ComponentLink3URL=https://datasheet.ciiva.com/18550/0zcg-18550767.pdf?src-supplier=Digi-Key, Contact Plating=Tin,Matte, Lead Free="Lead Free", Manufacturer Part Number=0ZCG0075FF2C, Mount="Surface Mount", Packaging="Cut Tape", Pricing 1="2000=0,0751, 4000=0,0699, 6000=0,065, 10000=0,0604 (USD)", RoHS=Yes, RoHS Compliant=Yes, Series=0ZCG, Stock 1=4661, Supplier 1="Arrow Electronics", Time to Trip=200ms
FB1: library part "FB 0805", "Ferrite Bead SMD 0805"
J1: "Conn Mini USB 2.0 Type B RCP 5 POS 0.8mm Solder ST Thru-Hole 5 Terminal 1 Port", Manufacturer="Amphenol Commercial", Category="USB Connectors", ComponentLink1Description=http://www.alliedelec.com/m/d/e7e3d7a920045eebbdef787e60d8b001.pdf?src-supplier=Allied+Electronics, ComponentLink1URL=http://www.alliedelec.com/m/d/e7e3d7a920045eebbdef787e60d8b001.pdf?src-supplier=Allied+Electronics, ComponentLink2Description=https://www.amphenolcanada.com/ProductSearch/drawings/AC/UE25BEX510X.pdf?src-supplier=Digi-Key, ComponentLink2URL=https://www.amphenolcanada.com/ProductSearch/drawings/AC/UE25BEX510X.pdf?src-supplier=Digi-Key, ComponentLink3Description=https://datasheet.octopart.com/UE25-BE55-10H-Amphenol-datasheet-14681365.pdf?src-supplier=Future+Electronics, ComponentLink3URL=https://datasheet.octopart.com/UE25-BE55-10H-Amphenol-datasheet-14681365.pdf?src-supplier=Future+Electronics, ComponentLink4Description=https://datasheet.octopart.com/UE25BE5510H-Amphenol-Communications-Solutions-datasheet-62282189.pdf?src-supplier=Electro+Sonic, ComponentLink4URL=https://datasheet.octopart.com/UE25BE5510H-Amphenol-Communications-Solutions-datasheet-62282189.pdf?src-supplier=Electro+Sonic, Manufacturer Part Number=UE25BE5510H, Pricing 1="1=0,4693, 10=0,4507, 25=0,4468, 50=0,4303, 100=0,4157 (USD)", RoHS=Yes, Stock 1=16852, Supplier 1="Arrow Electronics", Supplier Part Number 1=UE25BE5510H
J6 J7 J8: "Connector Header, XH Series, 3 Position, 2.50mm, Through Hole, Press-Fit, Solder, Natural", Manufacturer=JST, Manufacturer Part Number=B3B-XH-A(LF)(SN), Category="Headers and Wire Housings", ComponentLink1Description=https://datasheet.ciiva.com/26894/getdatasheetpartid-640434-26894454.pdf?src-supplier=Verical, ComponentLink1URL=https://datasheet.ciiva.com/26894/getdatasheetpartid-640434-26894454.pdf?src-supplier=Verical, ComponentLink2Description=https://datasheet.ciiva.com/26894/getdatasheetpartid-440399-26894778.pdf?src-supplier=Verical, ComponentLink2URL=https://datasheet.ciiva.com/26894/getdatasheetpartid-440399-26894778.pdf?src-supplier=Verical, ComponentLink3Description=https://datasheet.ciiva.com/11746/0900766b8082653f-11746520.pdf?src-supplier=Rs, ComponentLink3URL=https://datasheet.ciiva.com/11746/0900766b8082653f-11746520.pdf?src-supplier=Rs, Pricing 1="1=39,94, 10=25,1, 50=21,68, 100=18,25, 500=17,57, 1000=17,12, 2000=16,44, 4000=15,79 (JPY)", RoHS=Yes, Stock 1=2101, Supplier 1=CoreStaff
R1 R2 R3 R5 R6 R7 R8 R9 R10 R11: library part "RES 0805", "Resistor SMD 0805"
R4: library part "RES 0603", "Resistor SMD 0603"
U1: "GY-NEO6MV2 GPS Module"
U2: "USB Interface Integrated Circuit"
U3: "SX1276 E32-868T30D LoRa Module"
U4: library part L78M05CDT-TR, "IC REG LDO 5V 0.5A DPAK", Case/Package=TO-252, Dropout Voltage=2V, Manufacturer=STMicroelectronics, Max Operating Temperature=150°C, Max Output Current=500mA, Max Output Voltage=5V, Max Input Voltage=35V, Min Operating Temperature=0°C, Min Input Voltage=7V, Package Quantity=2500, Power Supply Rejection Ratio (PSRR)=62dB, Quiescent Current=6mA, Tolerance=5%, Category="Voltage Regulators - Linear", ComponentLink1Description=https://datasheet.ciiva.com/34303/2021024-34303902.pdf?src-supplier=Jameco, ComponentLink1URL=https://datasheet.ciiva.com/34303/2021024-34303902.pdf?src-supplier=Jameco, ComponentLink2Description=https://datasheet.ciiva.com/4882/cd00000447-93067-4882369.pdf?src-supplier=Mouser, ComponentLink2URL=https://datasheet.ciiva.com/4882/cd00000447-93067-4882369.pdf?src-supplier=Mouser, ComponentLink3Description=https://datasheet.ciiva.com/15111/getdatasheetpartid-111001-15111751.pdf?src-supplier=Verical, ComponentLink3URL=https://datasheet.ciiva.com/15111/getdatasheetpartid-111001-15111751.pdf?src-supplier=Verical, ComponentLink4Description=https://datasheet.ciiva.com/1512/1834365-1512349.pdf?src-supplier=Element14, ComponentLink4URL=https://datasheet.ciiva.com/1512/1834365-1512349.pdf?src-supplier=Element14, ComponentLink5Description=https://datasheet.ciiva.com/14111/tbl78mxxc-data-e-14111354.pdf?src-supplier=Distrelec, ComponentLink5URL=https://datasheet.ciiva.com/14111/tbl78mxxc-data-e-14111354.pdf?src-supplier=Distrelec, ComponentLink6Description=https://datasheet.ciiva.com/46425/1834365-46425535.pdf?src-supplier=Element14, ComponentLink6URL=https://datasheet.ciiva.com/46425/1834365-46425535.pdf?src-supplier=Element14, ComponentLink7Description=https://datasheet.ciiva.com/2041/cd00000447-2041991.pdf?src-supplier=Digi-Key, ComponentLink7URL=https://datasheet.ciiva.com/2041/cd00000447-2041991.pdf?src-supplier=Digi-Key, ComponentLink8Description=https://datasheet.ciiva.com/2041/cd00000447-2041990.pdf?src-supplier=Digi-Key, ComponentLink8URL=https://datasheet.ciiva.com/2041/cd00000447-2041990.pdf?src-supplier=Digi-Key, ComponentLink9Description=https://datasheet.ciiva.com/2041/cd00000447-2041992.pdf?src-supplier=Digi-Key, ComponentLink9URL=https://datasheet.ciiva.com/2041/cd00000447-2041992.pdf?src-supplier=Digi-Key, ComponentLink10Description=https://datasheet.ciiva.com/16443/cd00000447-16443381.pdf?src-supplier=Future+Electronics, ComponentLink10URL=https://datasheet.ciiva.com/16443/cd00000447-16443381.pdf?src-supplier=Future+Electronics, ComponentLink11Description=https://datasheet.ciiva.com/41439/001184659-da-01-en-ic-reg-ldo-5v-l78m05cdt-tr-to-252-3-stm-41439772.pdf?src-supplier=Conrad, ComponentLink11URL=https://datasheet.ciiva.com/41439/001184659-da-01-en-ic-reg-ldo-5v-l78m05cdt-tr-to-252-3-stm-41439772.pdf?src-supplier=Conrad, Height=2.4mm, Lead Free="Lead Free", Length=6.6mm, Manufacturer Part Number=L78M05CDT-TR, Min Output Voltage=5V, Mount="Surface Mount", Nominal Output Voltage=5V, Number of Outputs=1, Number of Pins=3, Number of Regulators=1, Output Configuration=Positive, Output Current=500mA, Output Type=Fixed, Output Voltage=5V, Packaging="Tape and Reel", Polarity=Positive, Pricing 1="1=0,72, 10=0,629, 50=0,629, 100=0,482, 1000=0,305, 10000=0,277 (USD)", Radiation Hardening=No, Reach SVHC Compliant=No, RoHS=Yes, RoHS Compliant=Yes, Series=-, Stock 1=74380, Supplier 1=Mouser, Width=6.2mm
U5: "Ldo, Fixed, 3.3V, 0.2A, Sot-89-3 Rohs Compliant: Yes", Case/Package=TO-243AA, Manufacturer=Diodes, Max Operating Temperature=125°C, Max Input Voltage=24V, Min Operating Temperature=-40°C, Min Output Voltage=3.3V, Output Current=250mA, Power Supply Rejection Ratio (PSRR)=60dB, Supplier Part Number 1=AP2205-33Y-13DICT-ND, ComponentLink1Description=https://datasheet.octopart.com/AP2205-33Y-13-Diodes-Inc.-datasheet-149521333.pdf?src-supplier=Farnell, ComponentLink1URL=https://datasheet.octopart.com/AP2205-33Y-13-Diodes-Inc.-datasheet-149521333.pdf?src-supplier=Farnell, ComponentLink2Description=https://www.diodes.com/assets/Datasheets/AP2205.pdf?src-supplier=Digi-Key, ComponentLink2URL=https://www.diodes.com/assets/Datasheets/AP2205.pdf?src-supplier=Digi-Key, ComponentLink3Description=https://datasheet.octopart.com/AP2205-33Y-13-Diodes-Inc.-datasheet-145012309.pdf?src-supplier=SHENGYU+ELECTRONICS, ComponentLink3URL=https://datasheet.octopart.com/AP2205-33Y-13-Diodes-Inc.-datasheet-145012309.pdf?src-supplier=SHENGYU+ELECTRONICS, Manufacturer Part Number=AP2205-33Y-13, Mount="Surface Mount", Number of Regulators=1, Output Configuration=Positive, Output Type=Fixed, Packaging="Cut Tape", Pricing 1="1=0,46, 10=0,372, 25=0,34, 100=0,2531, 250=0,22936, 500=0,1898, 1000=0,14235 (USD)", RoHS=Yes, Series=-, Stock 1=104598, Supplier 1=Digi-Key
X1: "Crystal 12MHz ±30ppm (Tol) ±50ppm (Stability) Series FUND 60Ohm 2-Pin HC-49/USX Thru-Hole Bulk", ESR (Equivalent Series Resistance)=60R, Frequency=12MHz, Frequency Stability=50ppm, Frequency Tolerance=30ppm, Manufacturer="ECS International", Max Operating Temperature=70°C, Min Operating Temperature=-10°C, Package Quantity=200, Category=Crystals, ComponentLink1Description=https://datasheet.ciiva.com/853/hc-49usx-853380.pdf?src-supplier=Digi-Key, ComponentLink1URL=https://datasheet.ciiva.com/853/hc-49usx-853380.pdf?src-supplier=Digi-Key, Height=3.5mm, Lead Free="Lead Free", Length=11.35mm, Manufacturer Part Number=ECS-120-S-4X, Mount="Through Hole", Number of Pins=49, Packaging=Bulk, Pricing 1="1=0,4681, 10=0,407, 50=0,4025, 100=0,3735, 500=0,3613, 1000=0,3221, 2500=0,3087 (USD)", RoHS=Yes, Series=HC-49USX, Stock 1=2209, Supplier 1="Arrow Electronics", Termination=Radial, Tolerance=30ppm, Width=4.65mm

## Free pads (board coordinates)
  round 5 hole 3: ""(4.1,71.1) ""(35.6,4.1) ""(56.1,71.1) ""(56.1,4.1)

## Via types
v1: diameter 0.6, hole 0.3, Top Layer to Bottom Layer, tented both sides, 15 vias
v2: diameter 0.9, hole 0.45, Top Layer to Bottom Layer, tented both sides, 8 vias

## Nets (pads, with @x,y where several pads share a name; then routed paths per layer and width w, separated by ;. In a path a pad name is that pad's centre, name@x,y a point inside that pad or via, vN(x,y) a via of type N, cw(c..) or ccw(c..) an arc to the next point about the centre after c; other vN are vias at no path point)
3V3: C2.2 C8.2 J3.3 J3.4 R6.1 R7.1 R8.1 R9.1 R11.1 U1.1 U2.4 U2.16 U5.3 | length 150
  Top Layer w0.3: C8.2 R11.1@25.35,41 ; 35.943,58.757 C2.2 37.267,58.69 U2.4 41.79,58.69 45.44,62.34 45.84,62.34 U2.16
  Top Layer w0.4: 35.6,67.5 35.6,59.1 35.943,58.757
  Top Layer w0.5: 13,74.3 35.307,74.3 35.6,74.007 35.6,72.1 ; 35.6,67.5 35.6,69.5 ; J3.3 37.06,69.5 35.6,69.5 ; J3.4 37.12,72.1 35.6,72.1 ; 35.6,69.5 35.6,72.1
  Top Layer w0.6: R6.1 13.6,44.5 ; R9.1 13.6,52.8 ; R8.1 13.6,55.9 ; R7.1 13.6,64.3 ; 13,74.3 11.1,72.4 11.1,69.1 13.6,66.6 13.6,64.3 ; 13.6,42.3 13.6,44.5 ; U5.3 19.4,43.5 20.501,42.399 20.501,41.058 C8.2 ; 13.6,44.5 13.6,52.8 ; 13.6,52.8 13.6,55.9 ; 13.6,55.9 13.6,64.3
  Top Layer w0.7: 13.6,42.3 17,38.9
  Top Layer w1: 17,38.9 20.443,38.9 ; U1.1@20.07,4.4 20.443,4.4 20.443,38.9 ; C8.2 20.443,38.9
5V: C1.2 C6.2 C7.2 FB1.2 R10.1 U3.6 U4.3 U5.1 | length 76.2
  Top Layer w0.3: C6.2 R10.1 R10.1@25.25,51.3
  Top Layer w1: 20.974,46.795 27.705,46.795 50.58,23.92 U3.6 ; FB1.2 FB1.2@27.922,67.75
  Bottom Layer w0.7: v2(16.4,53.4) v2(16.4,54.7) 17.6,54.7 26.2,63.3 v2(27.3,63.3) v2(28.6,63.3)
GND: C1.1 C2.1 C3.1 C4.1 C5.1 C6.1 C7.1 C8.1 D1.1 D6.K D7.K J1.5 J1.SH1 J1.SH2 J6.1 J7.2 J8.2 R3.1 R5.1 U1.4 U2.1 U3.7 U4.2 U5.2
  other v1: 42,23.4 44.4,25.8 37,31.6 39.5,31.6 49.6,31.6 53.4,31.6 37.9,56.65
  other v2: 15,54 15,55.3 28,61.9 29.3,61.9
GPS_RX: D5.K J8.3 U1.2 | length 58
  Top Layer w0.3: J8.3 5.925,50.2 D5.K
  Bottom Layer w0.3: J8.3 5.078,51.047 6.053,51.047 17.78,39.32 U1.2
GPS_TX: D2.K J4.1 J8.1 U1.3 | length 57.4
  Top Layer w0.3: J8.1 7.745,46.1 8.676,47.031 9.381,47.031 D2.K
  Bottom Layer w0.3: J4.1 5.025,40.915 J8.1 6.1,46.1 15.24,36.96 U1.3
NetC3_2: C3.2 U2.7 X1.1 | length 12.5
  Top Layer w0.3: C3.2 29.605,59.845 X1.1@33.295,59.845 ; X1.1 38.26,54.88 U2.7@40,54.88
NetC4_2: C4.2 R4.1 X1.2 | length 7.7
  Top Layer w0.3: C4.2 29.605,54.955 33.24,54.955 33.295,54.9 34.8,54.9 36.1,53.6 R4.1
NetC5_2: C5.2 D1.2 F1.2 U4.1
NetD2_A: D2.A R6.2 | length 3.6
  Top Layer w0.3: R6.2 9.45,44.843 9.8,45.193 10.143,45.193 11.007,46.057 11.007,46.757 D2.A
NetD3_A: D3.A R7.2 | length 3.6
  Top Layer w0.3: R7.2 9.893,63.957 9.893,63.257 10.757,62.393 11.1,62.393 11.45,62.043 D3.A
NetD4_A: D4.A R8.2 | length 3.6
  Top Layer w0.3: R8.2 9.55,56.243 9.9,56.593 10.243,56.593 11.107,57.457 11.107,58.157 D4.A
NetD5_A: D5.A R9.2 | length 3.6
  Top Layer w0.3: R9.2 9.893,52.457 9.893,51.757 10.757,50.893 11.1,50.893 11.45,50.543 D5.A
NetD6_A: D6.A R10.2 | length 2.6
  Top Layer w0.3: D6.A R10.2
NetD7_A: D7.A R11.2 | length 2.6
  Top Layer w0.3: R11.2 D7.A
NetF1_1: F1.1 J6.3 | length 5.9
  Top Layer w1: J6.3 18.25,70.05 18.25,64.325 F1.1
NetFB1_1: FB1.1 J1.1 | length 4.6
  Top Layer w0.3: 30,71 J1.1@31.3,71
  Top Layer w0.5: FB1.1@27.915,69.665 FB1.1 FB1.1@28.057,69.65 ; 28.4,71 30,71
  Top Layer w0.7: FB1.1@27.915,69.665 27.915,70.515 28.4,71
NetJ3_1: J3.1 R3.2 U3.2 | length 68.3
  Top Layer w0.3: U3.2@40.4,8.72 40.41,8.73 40.41,31.59 v1(40.4,31.6) ; R3.2@46.917,69.567 R3.2
  Top Layer w0.5: J3.1 R3.2@46.917,69.567
  Bottom Layer w0.3: v1(40.4,31.6) 40.481,31.6 40.631,31.75 40.65,31.75 48.8,39.9 48.8,63.8 44.747,67.853 J3.1
NetJ3_2: J3.2 R5.2 U3.1 | length 71.6
  Top Layer w0.3: U3.1 37.89,8.71 37.89,31.59 v1(37.9,31.6)
  Top Layer w0.5: J3.2 46.857,72.107 R5.2
  Bottom Layer w0.3: v1(37.9,31.6) 46.9,40.6 46.9,56.416 43.2,60.116 43.2,70.56 J3.2
NetR1_2: R1.2 U2.2 | length 9.5
  Top Layer w0.3: U2.2@40.627,61.357 U2.2 40.53,61.2 41.173,61.2 41.7,61.727 41.7,62.516 46.176,66.992 46.942,66.992 R1.2
NetR2_2: R2.2 U2.3 | length 8.3
  Top Layer w0.3: U2.3 40.548,60.008 41.408,60.008 45.8,64.4 R2.2
NetR4_2: R4.2 U2.8 | length 1.8
  Top Layer w0.3: R4.2 38.26,53.61 U2.8@40,53.61
RF_RX: D3.K J4.2 J7.3 R1.1 U3.3 | length 167.3
  Top Layer w0.254: R1.1 49.7,67 52.5,64.2 v1(52.5,31.6)
  Top Layer w0.3: J7.3 5.025,62.294 5.619,61.7 D3.K
  Bottom Layer w0.254: J4.2 2.7,61.5 3.739,62.539 4.964,62.539 J7.3 5.025,62.375 44.8,22.6 ; U3.3 42.96,8.45 45.11,6.3 53.7,6.3 54.6,7.2 54.6,12.8 44.8,22.6 ; v1(52.5,31.6) 52.5,30.3 44.8,22.6
RF_TX: D4.K J7.1 R2.1 U3.4 | length 119.3
  Top Layer w0.3: J7.1 7.7,57.6 8.6,58.5 D4.K ; v1(42.6,22.7) v1(45,25.1) ; R2.1 49.7,64.4 50.5,63.6 v1(50.5,31.6)
  Bottom Layer w0.3: J7.1 5.1,57.525 5.1,56.5 40.75,20.85 ; v1(42.6,22.7) 40.75,20.85 ; v1(45,25.1) 50.5,30.6 v1(50.5,31.6) ; U3.4 45.5,16.1 40.75,20.85
USB_D+: J1.3 U2.5 | length 18.9
  Top Layer w0.4: v1(38.6,57.4) 38.61,57.41 40.49,57.41 U2.5
  Bottom Layer w0.3: J1.3 30.892,69.2 30.688,68.996 30.619,68.996 29.7,68.077 29.7,65.3 37.2,57.8 38.2,57.8 v1(38.6,57.4)
USB_D-: J1.2 U2.6 | length 18.9
  Top Layer w0.3: v1(38.613,56.1) 38.637,56.125 40.475,56.125 U2.6
  Bottom Layer w0.3: J1.2@33.95,70.15 39.5,64.6 39.5,56.486 39.172,56.158 38.67,56.158 v1(38.613,56.1)
pads on no net: J1.4 J6.2 U2.9 U2.10 U2.11 U2.12 U2.13 U2.14 U2.15 U3.0 U3.5

## Polygon pours and split planes (outlines as drawn)
GND on Top Layer "GND_L01_P003" (solid, remove dead copper, pour order 3): 2.6,0.1 cw(c2.6,2.6) 0.1,2.6 0.1,72.6 cw(c2.6,72.6) 2.6,75.1 57.6,75.1 cw(c57.6,72.6) 60.1,72.6 60.1,2.6 cw(c57.6,2.6) 57.6,0.1
5V on Top Layer "NONET_L-01_P-001" (solid, pour order 2): 20.5,55.3 20.2,55.6 16.1,55.6 15.8,55.3 15.8,53 16.1,52.7 18.9,52.7 19.2,52.4 19.2,47.6 18.8,47.2 17,47.2 16.7,46.9 16.7,46.1 17,45.8 18.3,45.8 18.3,46 18.8,46.3 22.2,46.3 22.2,47.3 21.9,47.6 21.9,52.5 21.6,52.8 20.7,52.8 20.5,53
NetC5_2 on Top Layer "NONET_L-01_P-001" (solid, pour order 0): 26,69.7 25.7,70 22.3,70 22,69.7 22,67 21.7,66.7 20.716,66.7 20.4,66.407 20.4,62.5 20.1,62.2 19.5,62.2 19.2,61.9 19.2,59.8 19.1,59.7 16.9,59.7 16.7,59.5 16.7,57.4 17,57.099 20.199,57.099 20.5,57.4 20.5,59.3 20.728,59.5 21.3,59.5 21.6,59.8 21.6,61.6 21.9,61.9 23.7,61.9 24,62.2 24,65.9 24.3,66.2 25.7,66.2 26,66.5
5V on Top Layer "NONET_L-01_P-001" (solid, pour order 1): 28.8,68.8 29.2,68.4 29.2,63 28.9,62.7 27,62.7 26.7,63 26.7,68.5 27,68.8
GND on Bottom Layer "GND_L02_P004" (solid, remove dead copper, pour order 4): 2.6,0.1 cw(c2.6,2.6) 0.1,2.6 0.1,72.6 cw(c2.6,72.6) 2.6,75.1 57.6,75.1 cw(c57.6,72.6) 60.1,72.6 60.1,2.6 cw(c57.6,2.6) 57.6,0.1

## Silkscreen, mask and mechanical layers (free items; w line width, h text height)
Top Overlay:
  drawing of 23 lines, arcs and shapes, not listed
  text "M1" at 50.1,71.8 h1.3
  text "M0" at 50.1,69.319 h1.3
  text "IN -" at 9.7,67.5 h1.8 r90
  text "RF Mode Select" at 36.9,66.019 h1.3
  text "RF RX" at 12.9,61.4 h1.3
  text "RF TX" at 12.9,58.2 h1.3
  text "Avcılar Haberleşme Kartı" at 57.041,50.9 h1.7 r90
  text "GPS RX" at 12.9,49.919 h1.3
  text "5V LED" at 28.4,48.319 h1.3
  text "GPS TX" at 12.9,46.719 h1.3
  text "3V3 LED" at 28.4,40.619 h1.3
  text "GPS TEST" at 7.4,40.319 h1.3
Bottom Overlay:
  text "RF RX" at 9.261,62.204 h1.3
  text "GND" at 8.935,59.724 h1.3
  text "RF TX" at 9.09,57.304 h1.3
  text "GPS RX" at 10.23,50.622 h1.3
  text "GND" at 8.93,48.122 h1.3
  text "GPS TX" at 10.049,45.722 h1.3
Mechanical 1:
  the board outline again, w0.1

## Text inside footprints (layer, text, board x,y; h text height)
U1: Bottom Overlay "VCC" at 19.9,5.9 h1.8 r270; Bottom Overlay "RXD" at 17.4,5.9 h1.8 r270; Bottom Overlay "TXD" at 14.9,5.9 h1.8 r270; Bottom Overlay "GND" at 12.3,5.9 h1.8 r270
U3: Bottom Overlay "GND" at 37.1,42.057 h1.8 r270; Bottom Overlay "GND" at 44.839,42.057 h1.8 r270; Bottom Overlay "GND" at 42.3,42.057 h1.8 r270; Bottom Overlay "GND" at 39.7,42.057 h1.8 r270; Bottom Overlay "GND" at 53.66,14.237 h1.8 r90; Bottom Overlay "VCC" at 51.12,14.225 h1.8 r90; Bottom Overlay "AUX" at 48.6,13.779 h1.8 r90; Bottom Overlay "TXD" at 46.1,13.427 h1.8 r90; Bottom Overlay "RXD" at 43.5,13.587 h1.8 r90; Bottom Overlay "M1" at 41,12.641 h1.8 r90; Bottom Overlay "M0" at 38.4,12.937 h1.8 r90